# EAGLE board PPS1_schemas_V2 (EAGLE 9.6.2)
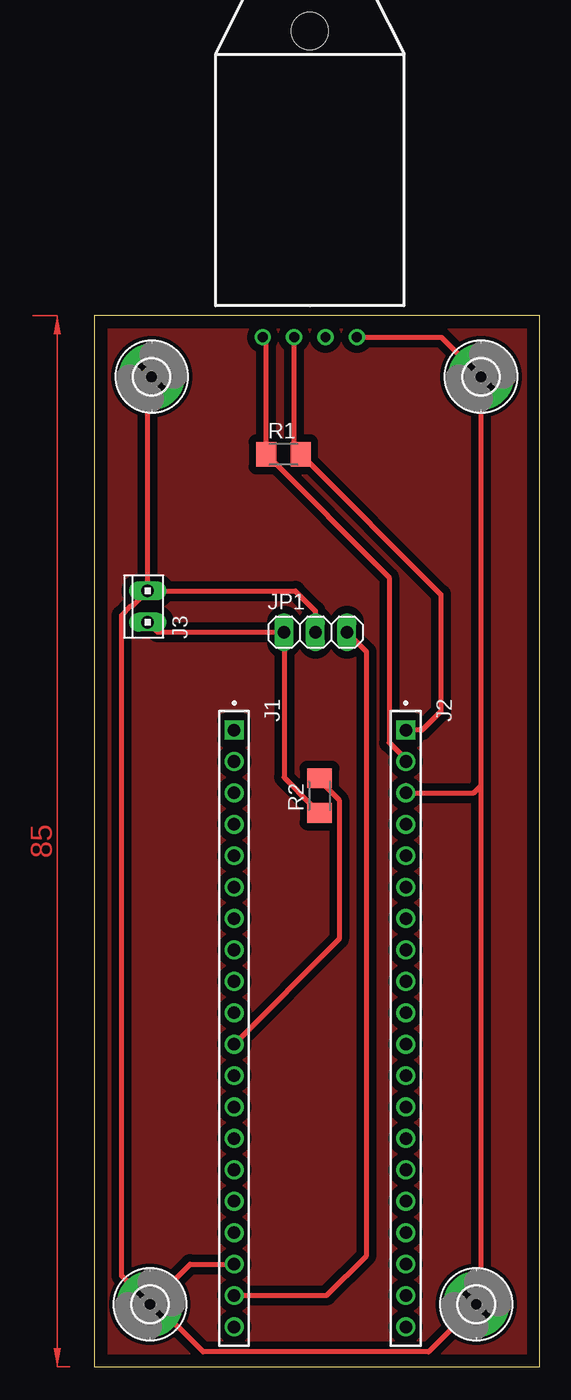
[diagram p0: board, top side]

Size 36 x 85 mm. Coordinates in mm from the lower left corner, seen from the top.
Outline: 0,0 36,0 36,85 0,85 0,0
Copper layers (1*16): Top 0.035mm / dielectric 1.5mm / Bottom 0.035mm
Design rules "TSO": minimum track width 15mil, minimum drill 24mil, track to track 15mil, track to pad 15mil, pad to pad 10mil, via to via 8mil, smd to smd 8mil, copper to edge 40mil, drill to drill 8mil, minimum pad ring 10mil, minimum via ring 8mil, stop-mask expansion 4mil, vias tented up to drill 0mil, thermal gap 10mil

## Footprints (pad centres in the part's own frame; a part is rotated, then mirrored left to right if it is on the bottom)
2,8-PAD = drill 2.8 pad 5.334: B2,8 0,0
SAMTEC_ESQ-120-13-G-S = drill 1.02 pad 1.37 square: 01 0,0 | drill 1.02 pad 1.37: 02 2.54,0; 03 5.08,0; 04 7.62,0; 05 10.16,0; 06 12.7,0; 07 15.24,0; 08 17.78,0; 09 20.32,0; 10 22.86,0; 11 25.4,0; 12 27.94,0; 13 30.48,0; 14 33.02,0; 15 35.56,0; 16 38.1,0; 17 40.64,0; 18 43.18,0; 19 45.72,0; 20 48.26,0
10X02MTA = drill 1.016 long: 1 1.27,0; 2 -1.27,0
1X03 = drill 1.016 long: 1 -2.54,0; 2 0,0; 3 2.54,0
M1206 = smd 1.6 x 2: 1 -1.4,0; 2 1.4,0
DHT22 = drill 0.8: DATA -1.27,0; GND 3.81,0; NC 1.27,0; VDD -3.81,0 | hole 3: 0,24.765

## Placement (x,y rotation side)
H1  MOUNT-PAD-ROUND2.8  [2,8-PAD]  4.49,5.07 0 top
H2  MOUNT-PAD-ROUND2.8  [2,8-PAD]  30.87,5.07 0 top
H3  MOUNT-PAD-ROUND2.8  [2,8-PAD]  31.25,80.07 0 top
H4  MOUNT-PAD-ROUND2.8  [2,8-PAD]  4.63,80.07 0 top
J1  ESQ-120-13-G-S  [SAMTEC_ESQ-120-13-G-S]  11.29,51.5 270 top
J2  ESQ-120-13-G-S  [SAMTEC_ESQ-120-13-G-S]  25.18,51.5 270 top
J3  [10X02MTA]  4.31,61.49 90 top
JP1  [1X03]  17.87,59.42 0 top
R1  5K  [M1206]  15.28,73.8 0 top
R2  10K  [M1206]  18.2,46.2 90 top
U$1  DHT22  [DHT22]  17.41,83.27 0 top

## Library data of the parts
H1-H4 = holes
J1 J2 = 20x1_connector; AVAILABILITY: In Stock; CHECK_PRICES: https://www.snapeda.com/parts/ESQ-120-13-G-S/Samtec/view-part/?ref=eda; DESCRIPTION: 20 Position Elevated Socket Connector 0.100 (2.54mm) Through Hole Gold; MF: Samtec; MP: ESQ-120-13-G-S; PACKAGE: None; PRICE: None; SNAPEDA_LINK: https://www.snapeda.com/parts/ESQ-120-13-G-S/Samtec/view-part/?ref=snap
J3 = con-amp
JP1 = pinhead
R1 R2 = 2_TGE-sur G
U$1 = DHT22; AVAILABILITY: Not in stock; CHECK_PRICES: https://www.snapeda.com/parts/DHT22/Aosong+Electronics/view-part/?ref=eda; DESCRIPTION: Capacitive-type humidity and temperature module/sensor; MF: Aosong Electronics; MP: DHT22; PACKAGE: Package; PRICE: None; SNAPEDA_LINK: https://www.snapeda.com/parts/DHT22/Aosong+Electronics/view-part/?ref=snap

## Nets
N$1: J2.01 R1.2 U$1.DATA
N$2: J2.02 R1.1 U$1.VDD
N$4: J1.11 R2.2
N$5: J1.19 JP1.3
PE: H1.B2,8 H2.B2,8 H3.B2,8 H4.B2,8 J1.18 J2.03 J3.1 JP1.2 U$1.GND
VCC: J3.2 JP1.1 R2.1

## Tracks (layer width: path | path; a pad name or v marks a point on that pad's centre or on a via)
GND
  pour Top (isolate 0.61): 1,84 35,84 35,1 1,1
N$1
  Top 0.406: U$1.DATA 16.14,74.34 R1.2 28,62.48 28,53 26.5,51.5 J2.01
N$2
  Top 0.406: U$1.VDD 13.88,82.99 R1.1 23.83,63.85 23.83,50.49 25.18,49.15 J2.02
N$4
  Top 0.406: R2.2 18.2,47.43 19.78,45.84 19.78,34.59 J1.11
N$5
  Top 0.406: J1.19 18.78,5.78 22,9 22,57.83 JP1.3
PE
  Top 0.406: J3.1 4.31,79.75 H4.B2,8 | J1.18 7.74,8.32 H1.B2,8 4.28,5.28 | J3.1 16.24,62.76 17.87,61.13 JP1.2 | 31.25,47 H3.B2,8 28.05,83.27 U$1.GND | 31.25,47 31.25,5.45 H2.B2,8 27.02,1.22 8.78,1.22 4.72,5.28 4.28,5.28 | J3.1 3.12,61.57 2.99,61.57 2.2,60.78 2.2,7.36 4.28,5.28 | 25.18,47.05 J2.03 30.67,46.42 31.25,47
VCC
  Top 0.406: J3.2 5.11,59.42 JP1.1 15.33,47.67 17.5,45.5 18,45 R2.1
(copper drawn outside any net)
  shapes: Top area x2